# Altium PCB PCB_PressureTempMon_2024-08-19.pcbdoc
Units mil, origin at the board's own origin, x right, y up, seen from the top; angles counter-clockwise.
Board outline 2802.91 x 1967.9 mil, 2 copper layers (Top Layer, Bottom Layer); 17 components, 13 nets, 63 pads, 4 vias.
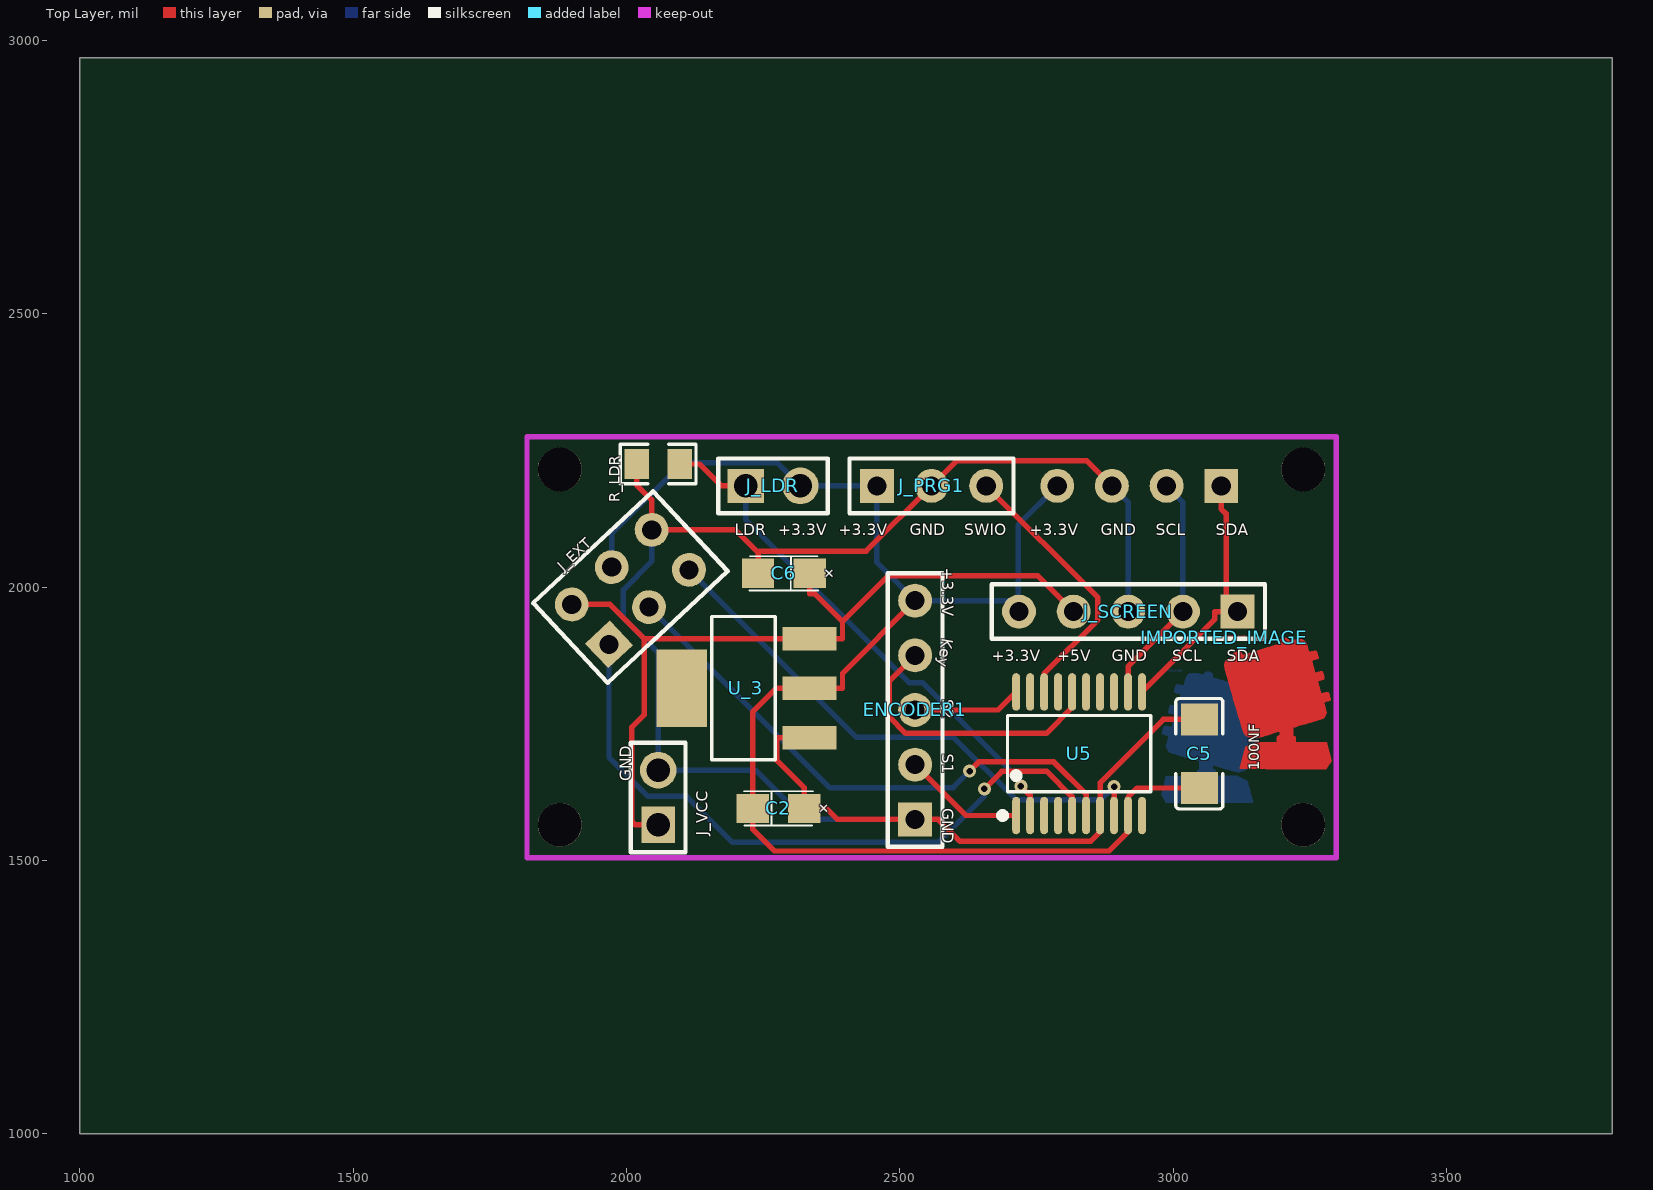
[diagram p0: Top Layer view]
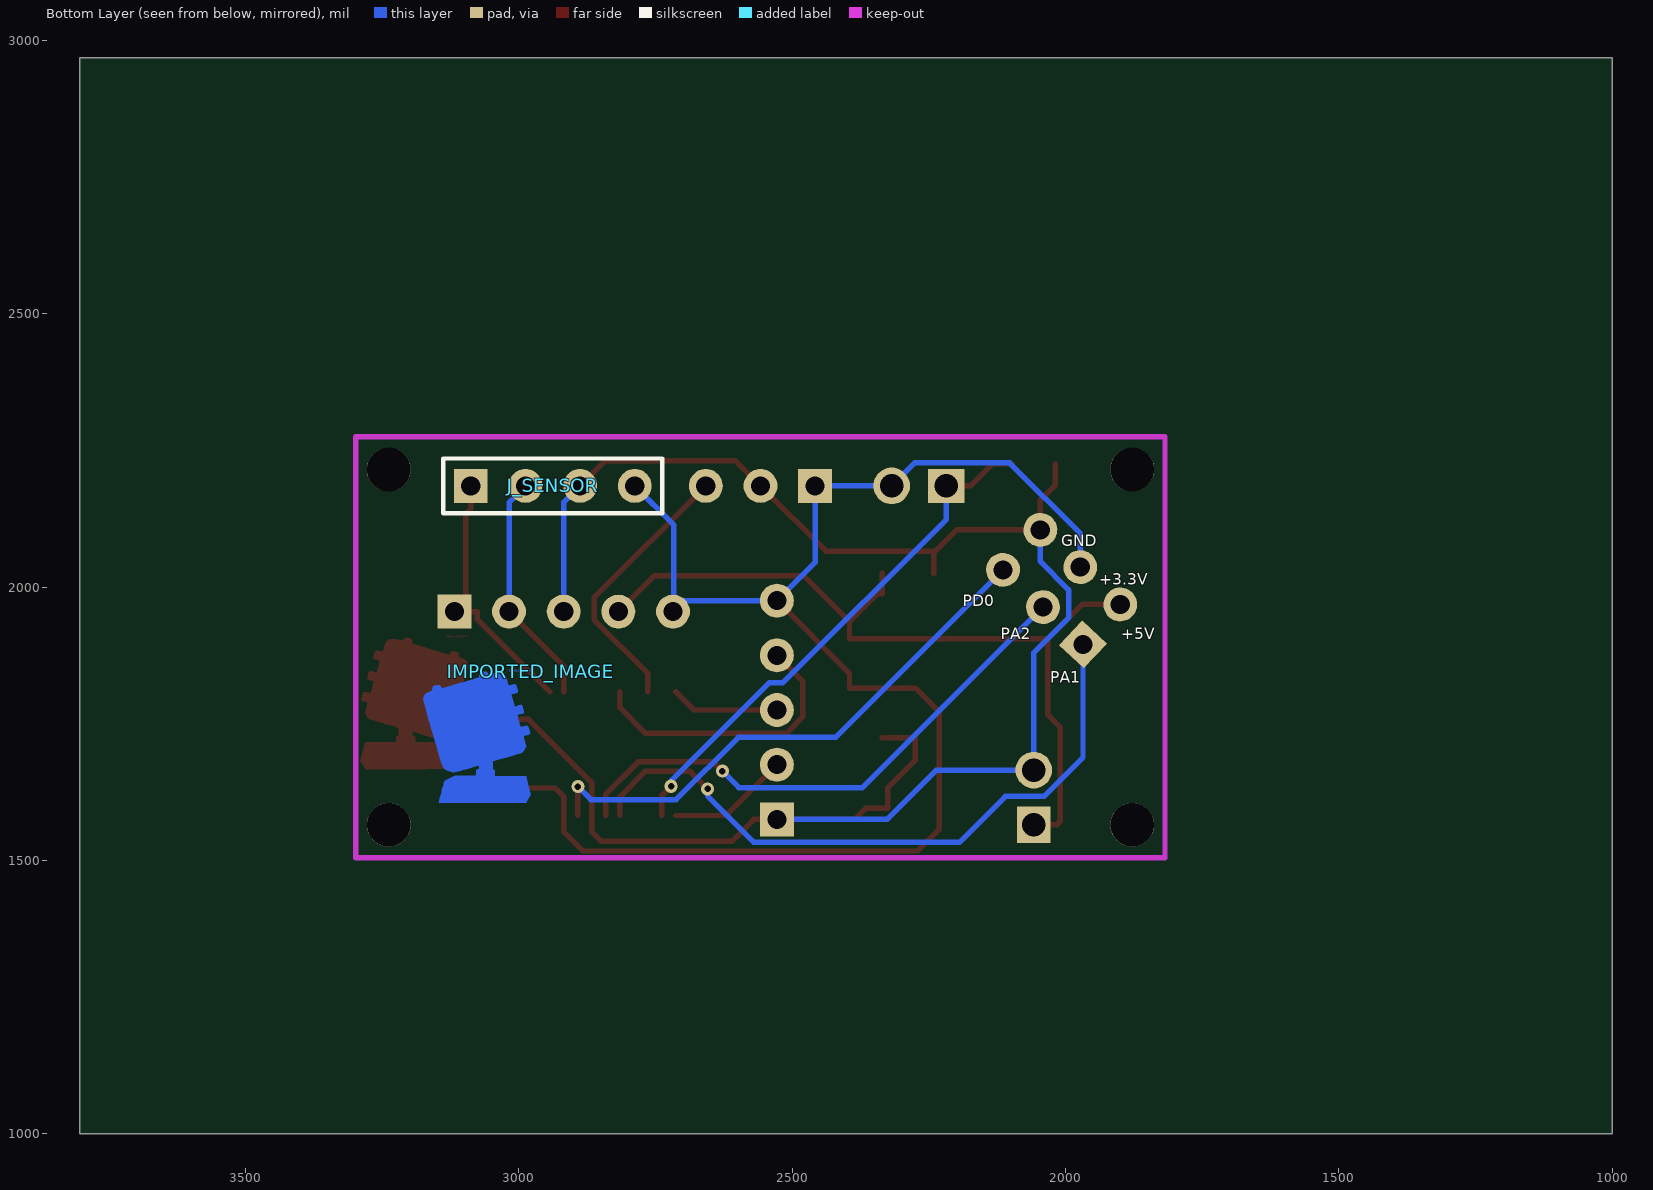
[diagram p1: Bottom Layer view, seen from below]

## Layer stack, top to bottom
Top Layer: signal copper (thickness not stored)
Dielectric: dielectric 12.6, FR-4, Dk 4.8
Bottom Layer: signal copper (thickness not stored)

## Board outline
3802.91,1000 1000,1000 1000,2967.9 3802.91,2967.9

## Components (designator, comment, footprint, x,y, rotation, side; value= is the part's Value field where it differs from the comment)
C2 "10uF" CASE-A_3216 2277.91,1595 r0 top
C5 "100nF" C1206 3047.91,1695 r90 top
C6 "10uF" CASE-A_3216 2287.91,2025 r180 top
ENCODER1 "HDR-M-2.54_1x5" HDR-M-2.54_1X5 2527.91,1775 r90 top
IMPORTED_IMAGE "IMPORTED_IMAGE" IMPORTED_IMAGE 2977.91,1845 r0 bottom
IMPORTED_IMAGE "IMPORTED_IMAGE" IMPORTED_IMAGE 3093.17,1906.74 r0 top
J_EXT "HDR-M-2.54_2x3" HDR-M-2.54_2X3 1967.91,1895 r43 top
J_LDR "HDR-M-2.54_1x2" HDR-M-2.54_1X2 2267.91,2185 r0 top
J_PRG1 "HDR-M-2.54_1x3" HDR-M-2.54_1X3 2557.91,2185 r0 top
J_SCREEN "HDR-M-2.54_1x5" HDR-M-2.54_1X5 2917.91,1955 r180 top
J_SENSOR "HDR-M-2.54_1x4" HDR-M-2.54_1X4 2937.91,2185 r0 bottom
J_VCC "HDR-M-2.54_1x2" HDR-M-2.54_1X2 2057.91,1615 r90 top
R_LDR "10kΩ" R0805 2057.91,2225 r180 top
U5 "CH32V003F4P6" TSSOP-20_L6.5-W4.4-P0.65-LS6.4-BL 2827.91,1695 r0 top
U_3 "LM1117GS-3.3" SOT-223-3_L6.5-W3.4-P2.30-LS7.0-BR 2217.91,1815 r0 top
? "" ? 1679.95,1890 r0 top
? "" ? 2557.91,2365.45 r0 top

## Footprints (in the part's own frame and the unit in brackets; to place one, negate y for a bottom-side part, rotate by r counter-clockwise, add the part's x,y. Pads: shape width x height; smd on the part's side, far side on the other; paste and mask are expansions set on the pad)
C1206 [mm]
  rect 1.485x1.728 smd paste-100 mask+0.051: 1(-1.593,0) 2(1.593,0)
  silkscreen extent -2.56,-1.09 2.56,1.09
CASE-A_3216 [mm]
  rect 1.5x1.359 smd paste+0 mask+0.051: 1(-1.2,0) 2(1.2,0)
  silkscreen extent -1.6,-0.8 1.6,0.8
HDR-M-2.54_1X2 [mm]
  rect 1.7x1.575 hole 1.1 paste+0 mask+0.051: 1(-1.27,0)
  round 1.7 hole 1.1 paste+0 mask+0.051: 2(1.27,0)
  silkscreen extent -2.54,-1.27 2.54,1.27
HDR-M-2.54_1X3 [mil]
  rect 62x62 hole 35 paste+0 mask+2: 1(-100,0)
  round 62 hole 35 paste+0 mask+2: 2(0,0) 3(100,0)
  silkscreen extent -150,-50 150,50
HDR-M-2.54_1X4 [mil]
  rect 62x62 hole 35 paste+0 mask+2: 1(150,0)
  round 62 hole 35 paste+0 mask+2: 2(50,0) 3(-50,0) 4(-150,0)
  silkscreen extent -200,-50 200,50
HDR-M-2.54_1X5 [mil]
  rect 62x62 hole 35 paste+0 mask+2: 1(-200,0)
  round 62 hole 35 paste+0 mask+2: 2(-100,0) 3(0,0) 4(100,0) 5(200,0)
  silkscreen extent -250,-50 250,50
HDR-M-2.54_2X3 [mil]
  rect 62x62 hole 35 paste+0 mask+2: 1(0,0)
  round 62 hole 35 paste+0 mask+2: 2(0,100) 3(100,0) 4(100,100) 5(200,0) 6(200,100)
  silkscreen extent -50,-50 250,150
IMPORTED_IMAGE [mil]
  Top Layer region: 598 vertices and 5 holes, not listed, extent 0,0 196.72,240.15
  Top Layer region: 309 vertices and 0 holes, not listed, extent 52.04,103.42 149.9,142.15
R0805 [mil]
  rect 44.59x54.21 smd paste-3937.01 mask+2: 1(-39.37,0) 2(39.37,0)
  silkscreen extent -69,-36 69,36
SOT-223-3_L6.5-W3.4-P2.30-LS7.0-BR [mm]
  rect 2.5x1.1 smd paste+0 mask+0.051: 1(2.97,-2.3) 2(2.97,0) 3(2.97,2.3)
  rect 2.34x3.6 smd paste+0 mask+0.051: 4(-2.97,0)
  silkscreen extent -1.57,-3.33 1.37,3.33
TSSOP-20_L6.5-W4.4-P0.65-LS6.4-BL [mm]
  oval 0.364x1.742 smd paste+0 mask+0.051: 1(-2.925,-2.871) 2(-2.275,-2.871) 3(-1.625,-2.871) 4(-0.975,-2.871) 5(-0.325,-2.871) 6(0.325,-2.871) 7(0.975,-2.871) 8(1.625,-2.871) 9(2.275,-2.871) 10(2.925,-2.871) 11(2.925,2.871) 12(2.275,2.871) 13(1.625,2.871) 14(0.975,2.871) 15(0.325,2.871) 16(-0.325,2.871) 17(-0.975,2.871) 18(-1.625,2.871) 19(-2.275,2.871) 20(-2.925,2.871)
  silkscreen extent -3.71,-3.02 3.33,1.77
? [mil]

## Free pads (board coordinates)
  round 80 hole 80 unplated paste+0: ""(1877.91,1565) ""(1877.91,2215) ""(3237.91,1565) ""(3237.91,2215)

## Via types
v1: diameter 24.02, hole 12.01, Top Layer to Bottom Layer, tented both sides, 4 vias

## Nets (pads, with @x,y where several pads share a name; then routed paths per layer and width w, separated by ;. In a path a pad name is that pad's centre, name@x,y a point inside that pad or via, vN(x,y) a via of type N, cw(c..) or ccw(c..) an arc to the next point about the centre after c; other vN are vias at no path point)
+3.3V: C2.1 C5.1 ENCODER1.5 J_EXT.4 J_LDR.2 J_PRG1.1 J_SCREEN.5 J_SENSOR.4 U5.9 U_3.2 | length 2835.6
  Top Layer w10: ENCODER1.5 2395.04,1842.13 2395.04,1815 U_3.2 2274.63,1815 2230.67,1771.04 C2.1 2230.67,1557.26 2270.87,1517.06 2882.62,1517.06 2917.48,1551.92 U5.9 2917.48,1615.76 2934.02,1632.3 C5.1
  Bottom Layer w10: J_EXT.4 1972.85,2097.72 2102.19,2227.06 2275.85,2227.06 J_LDR.2 2415.92,2185 J_PRG1.1 2457.91,2045 ENCODER1.5 J_SCREEN.5@2716.34,1975 ; J_SCREEN.5 2716.34,1956.57 J_SCREEN.5@2716.34,1975 ; J_SENSOR.4 2716.34,2113.43 J_SCREEN.5@2716.34,1975
+5V: C6.1 J_EXT.2 J_SCREEN.4 J_VCC.1 U_3.3 | length 1550.4
  Top Layer w10: J_EXT.2 1969.66,1968.14 2032.25,1905.55 ; J_VCC.1 2015.92,1565 2009.88,1571.04 2009.88,1743.75 2032.25,1766.12 2032.25,1905.55 ; C6.1@2335.15,2025 2335.15,1987.26 2344.58,1987.26 2395.04,1936.8 ; J_SCREEN.4 2751.9,2021.01 2479.25,2021.01 2395.04,1936.8 ; 2032.25,1905.55 U_3.3 2395.04,1905.55 2395.04,1936.8
GND: C2.2 C5.2 C6.2 ENCODER1.1 J_EXT.6 J_PRG1.2 J_SCREEN.3 J_SENSOR.3 J_VCC.2 R_LDR.2 U5.7 U_3.1 | length 3458
  Top Layer w10: R_LDR.2 2018.54,2186.9 2045.98,2159.46 J_EXT.6 2198.88,2104.53 2240.67,2062.74 ; C6.2 2240.67,2062.74 ; U_3.1 2274.63,1724.45 2274.63,1683.26 2325.15,1632.74 2325.15,1595 2365.67,1595 2385.67,1575 ENCODER1.1 2569.9,1575 2610.03,1534.87 2849,1534.87 2866.3,1552.17 U5.7 2866.3,1641.87 2982.13,1757.7 C5.2 ; J_SENSOR.3 2841.72,2231.19 2604.1,2231.19 J_PRG1.2 2438.36,2065.45 2243.38,2065.45 2240.67,2062.74
  Bottom Layer w10: J_EXT.6 2045.98,2046.85 1994.09,1994.96 1994.09,1943.7 2057.91,1879.88 J_VCC.2 2236.24,1665 2326.24,1575 ENCODER1.1 ; J_SENSOR.3 2917.91,2155 J_SCREEN.3
KEY: ENCODER1.4 U5.16 | length 526.9
  Top Layer w10: ENCODER1.4 2480.79,1827.88 2480.79,1762.32 2510.72,1732.39 2767.85,1732.39 2815.12,1779.66 U5.16
PA1: J_EXT.1 U5.5 | length 1233
  Top Layer w10: v1(2654.73,1630.64) 2686.68,1662.59 2768.73,1662.59 2815.12,1616.2 U5.5
  Bottom Layer w10: J_EXT.1 1967.91,1688.23 2039.13,1617.01 2109.89,1617.01 2193.96,1532.94 2569.97,1532.94 2654.73,1617.7 v1(2654.73,1630.64)
PA2: J_EXT.3 U5.6 | length 1019.7
  Top Layer w10: v1(2627.56,1663.19) 2644.7,1680.33 2781.39,1680.33 2840.71,1621.01 U5.6
  Bottom Layer w10: J_EXT.3 2371.31,1632.94 2597.31,1632.94 v1(2627.56,1663.19)
PD0: J_EXT.5 U5.8 | length 1014.4
  Top Layer w10: U5.8 v1(2891.89,1634.73)
  Bottom Layer w10: J_EXT.5 2420.58,1725 2598.37,1725 2712.27,1611.1 2868.26,1611.1 v1(2891.89,1634.73)
PD5: J_LDR.1 R_LDR.1 U5.2 | length 970.3
  Top Layer w10: R_LDR.1 2133.46,2225 2173.46,2185 J_LDR.1 ; v1(2721.5,1635.62) 2738.34,1618.78 U5.2
  Bottom Layer w10: J_LDR.1 2217.91,2123.89 2516.8,1825 2541.58,1825 2721.5,1645.08 v1(2721.5,1635.62)
S1: ENCODER1.2 U5.1 | length 223.4
  Top Layer w10: ENCODER1.2 2620.94,1581.97 U5.1@2712.75,1581.97
S2: ENCODER1.3 U5.20 | length 198.5
  Top Layer w10: ENCODER1.3 2679.72,1775 U5.20@2712.75,1808.03
SCL: J_SCREEN.2 J_SENSOR.2 U5.12 | length 431
  Top Layer w10: U5.12 2917.48,1854.57 J_SCREEN.2
  Bottom Layer w10: J_SENSOR.2 3017.91,2155 J_SCREEN.2
SDA: J_SCREEN.1 J_SENSOR.1 U5.11 | length 477.7
  Top Layer w10: U5.11 3075.92,1940.88 3075.92,1955 J_SCREEN.1@3096.92,1955 ; J_SENSOR.1 3087.91,2143.01 3096.92,2134 J_SCREEN.1@3096.92,1955 ; J_SCREEN.1 J_SCREEN.1@3096.92,1955
SWIO: J_PRG1.3 U5.18 | length 502.5
  Top Layer w10: J_PRG1.3 2862.4,1980.51 2862.4,1939.99 2763.93,1841.52 U5.18
pads on no net: U5.3 U5.4 U5.10 U5.13 U5.14 U5.15 U5.17 U5.19 U_3.4

## Silkscreen, mask and mechanical layers (free items; w line width, h text height)
Top Overlay:
  text "LDR" at 2197.91,2094.57 h20.87
  text "+3.3V" at 2277.91,2094.57 h20.87
  text "+3.3V" at 2387.91,2094.57 h20.87
  text "GND" at 2517.91,2094.57 h20.87
  text "SWIO" at 2617.91,2094.57 h20.87
  text "+3.3V" at 2737.91,2094.57 h20.87
  text "GND" at 2867.91,2094.57 h20.87
  text "SCL" at 2967.91,2094.57 h20.87
  text "SDA" at 3077.91,2094.57 h20.87
  text "+3.3V" at 2577.48,2035 h20.87 r270
  text "+" at 2385.29,2022.38 h20.87 r135
  text "Key" at 2577.63,1906.81 h20.87 r260
  text "+3.3V" at 2667.91,1864.57 h20.87
  text "+5V" at 2787.91,1864.57 h20.87
  text "GND" at 2887.91,1864.57 h20.87
  text "SCL" at 2997.91,1864.57 h20.87
  text "SDA" at 3097.91,1864.57 h20.87
  text "S2" at 2577.48,1795 h20.87 r270
  text "S1" at 2577.48,1695 h20.87 r270
  text "100NF" at 3157.75,1665 h19.68 r90
  text "GND" at 2008.34,1645 h20.87 r90
  text "GND" at 2577.48,1595 h20.87 r270
  text "+" at 2375.29,1592.38 h20.87 r135
Bottom Overlay:
  text "GND" at 2007.91,2074.57 h20.87
  text "+3.3V" at 1937.91,2004.57 h20.87
  text "PD0" at 2187.91,1964.57 h20.87
  text "+5V" at 1897.91,1904.57 h20.87
  text "PA2" at 2117.91,1904.57 h20.87
  text "PA1" at 2027.91,1824.57 h20.87